# Altium PCB triumvi_v9.1_mcu.PcbDoc
Units mil, origin at the board's own origin, x right, y up, seen from the top; angles counter-clockwise.
Board outline 1100 x 1020 mil, 6 copper layers (Top Layer, GND, VCC, Signal Layer 2, GND (Mid4), Bottom Layer), stack 48.468 mil thick; 61 components, 61 nets, 278 pads, 130 vias.
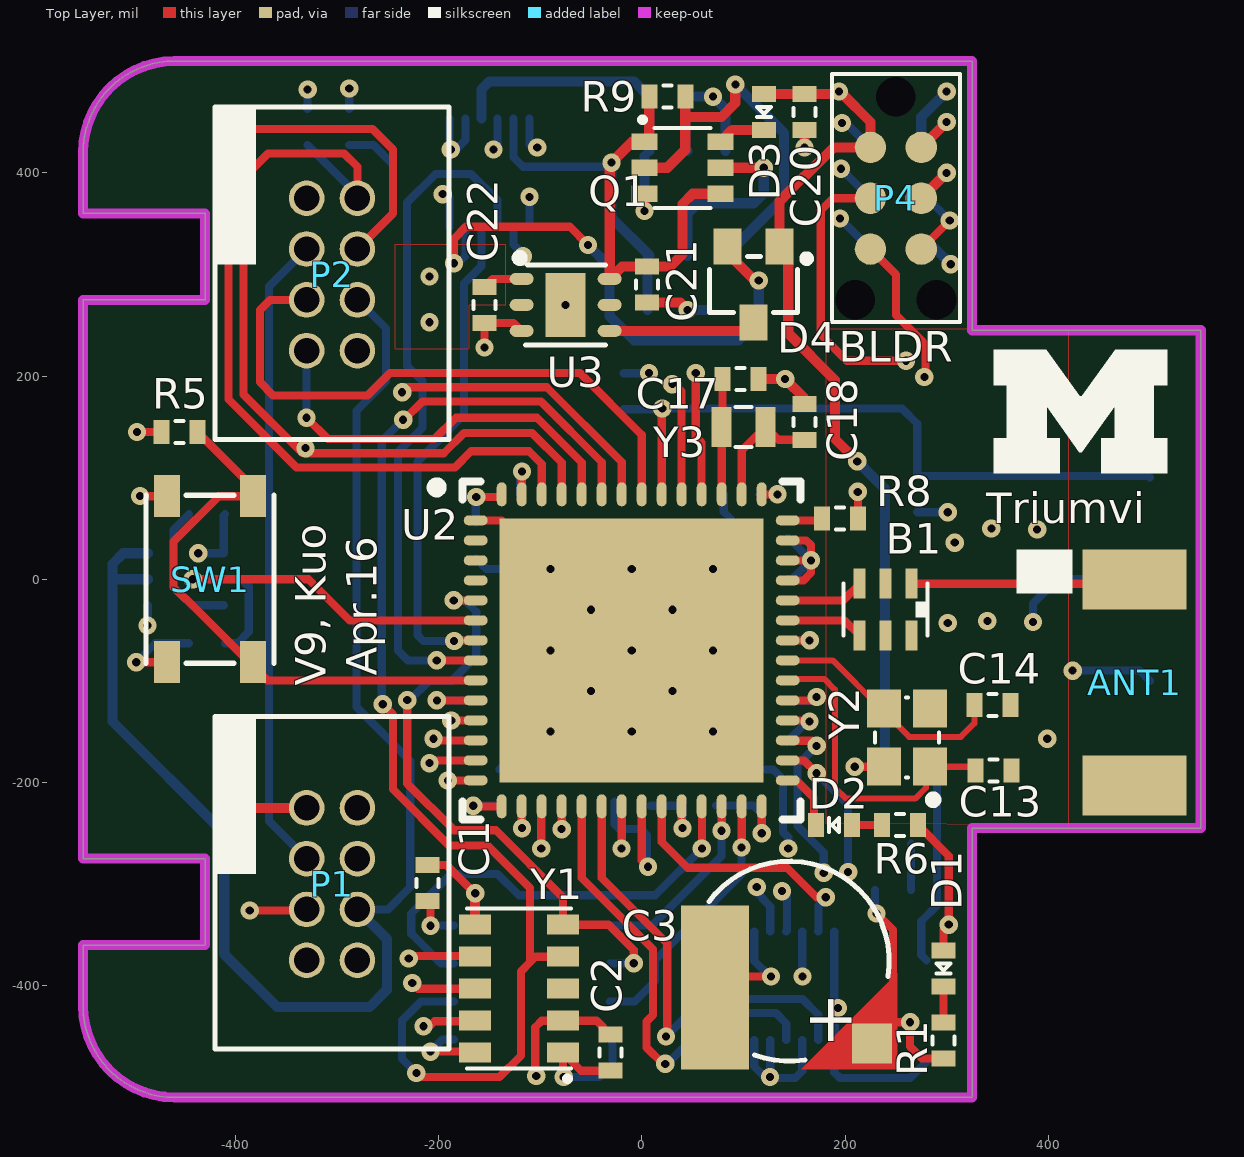
[diagram p0: Top Layer view]
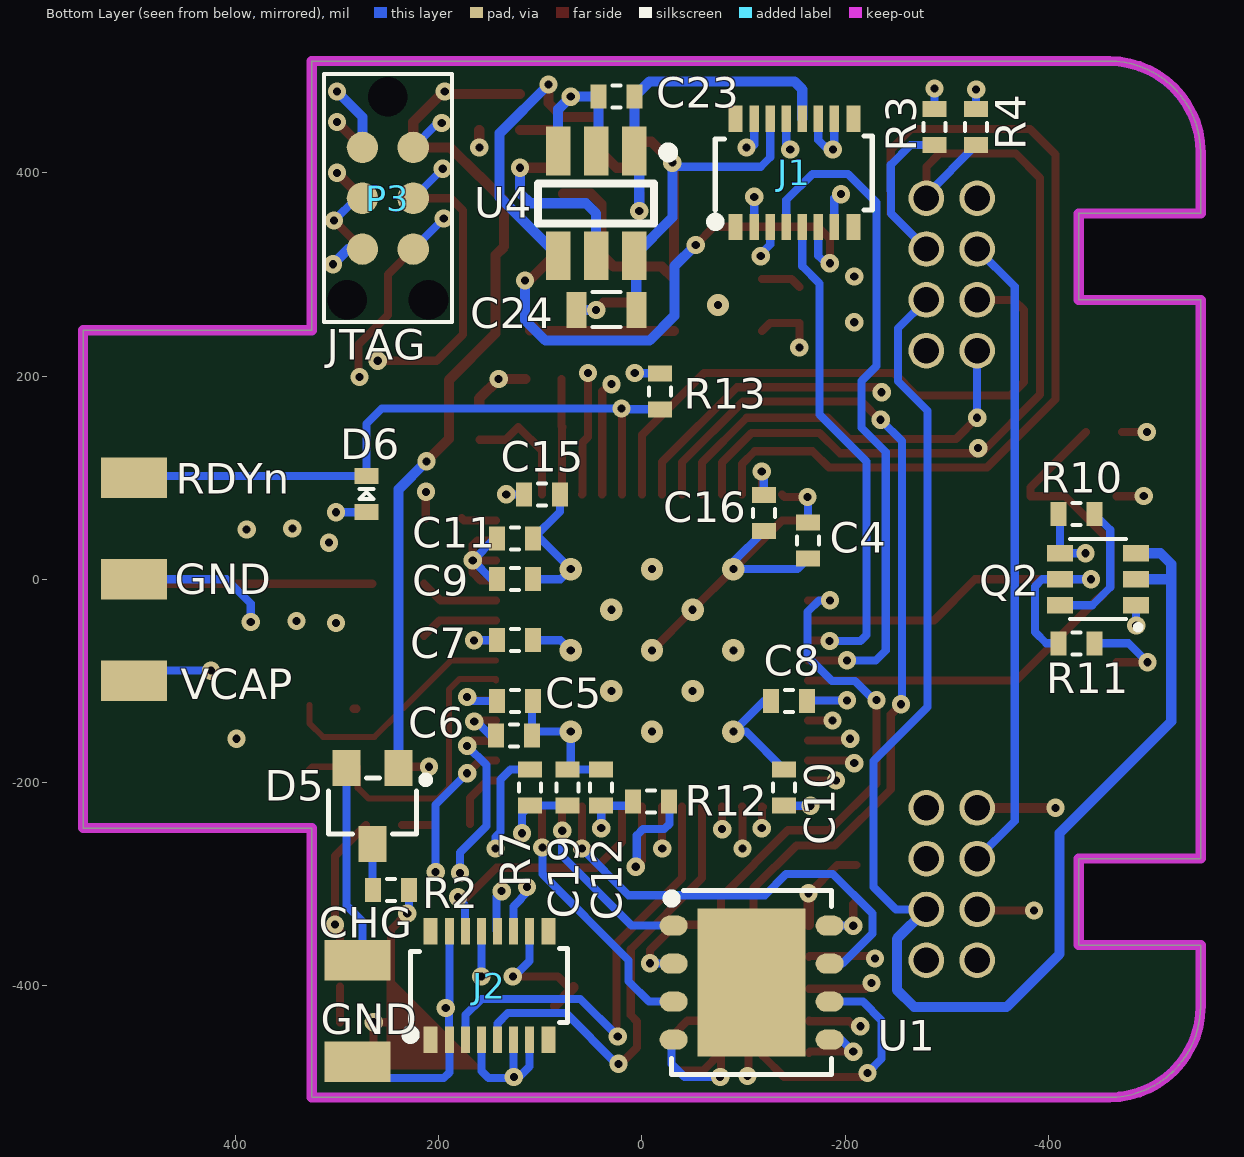
[diagram p1: Bottom Layer view, seen from below]
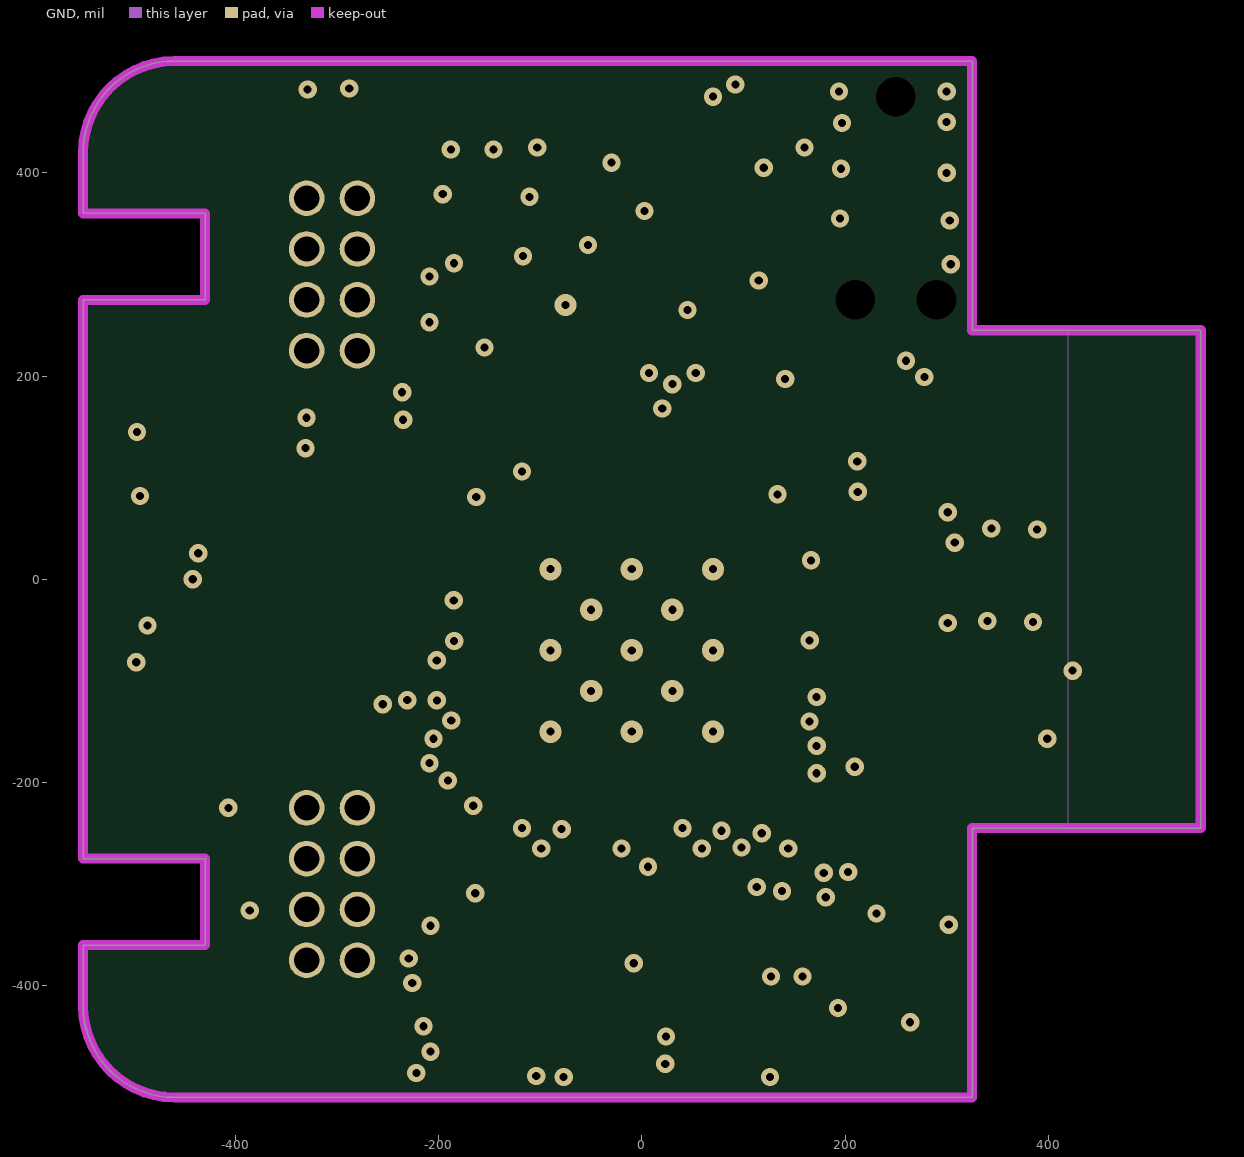
[diagram p2: GND]
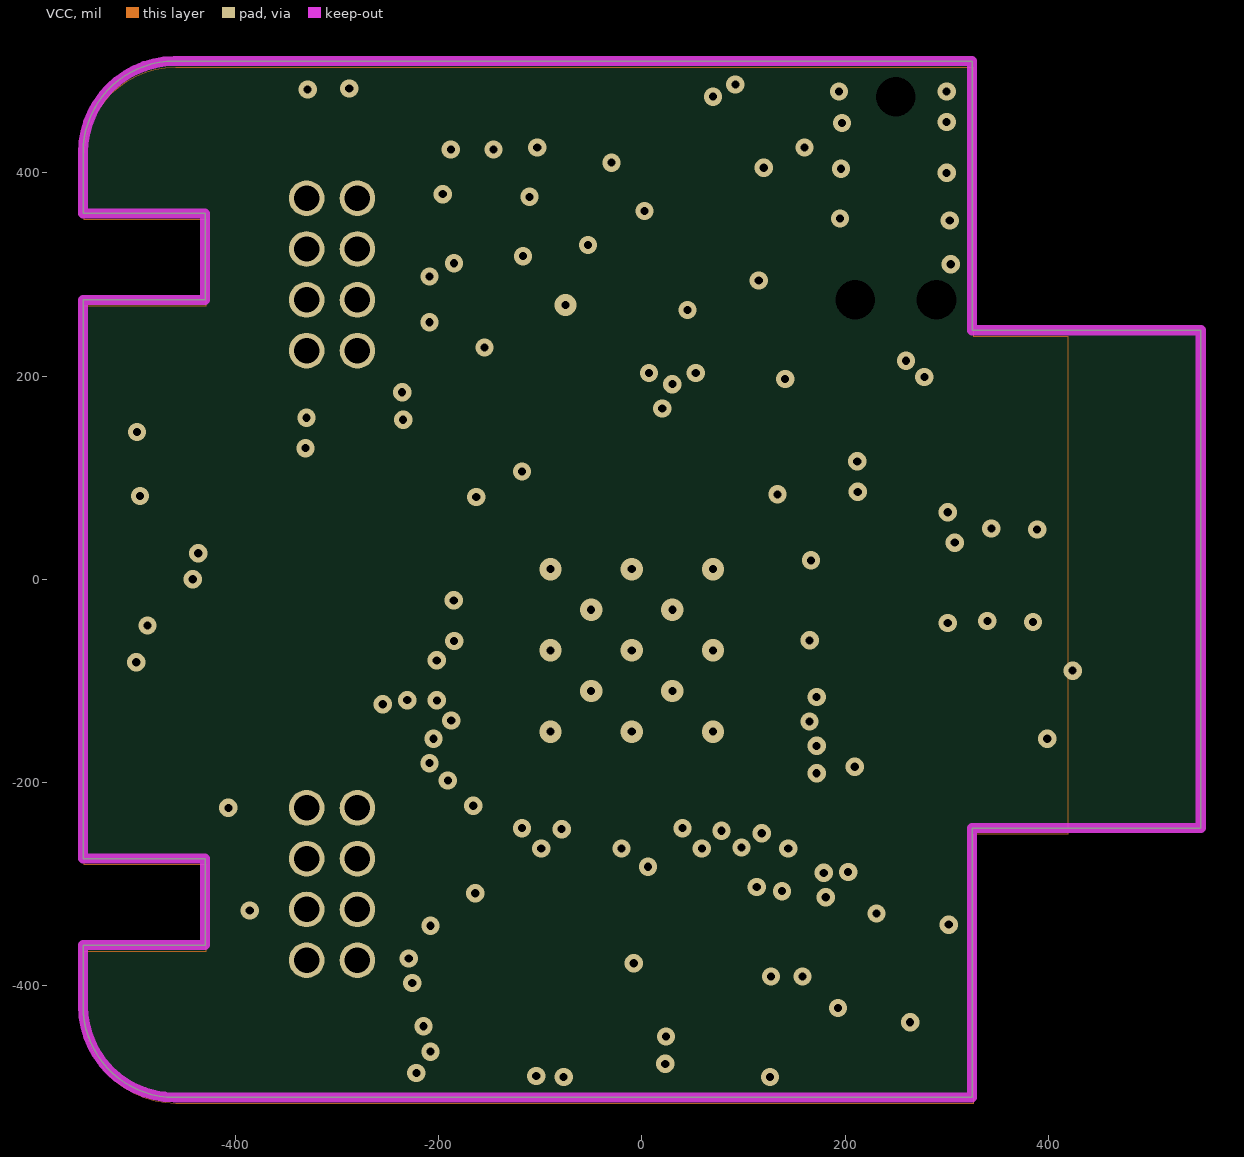
[diagram p3: VCC]
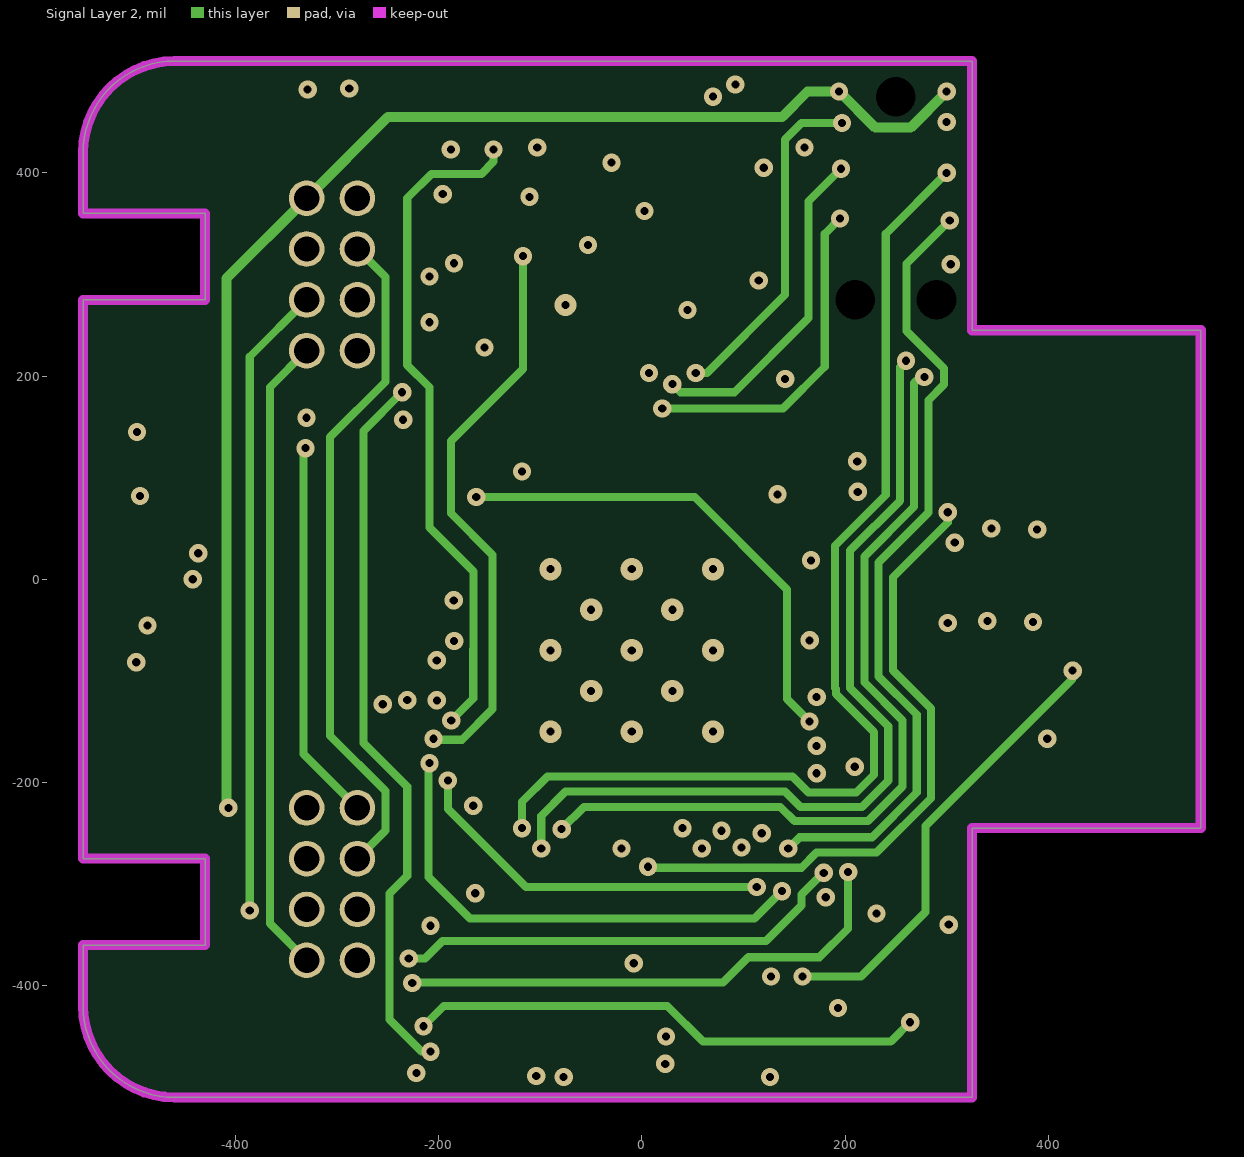
[diagram p4: Signal Layer 2]
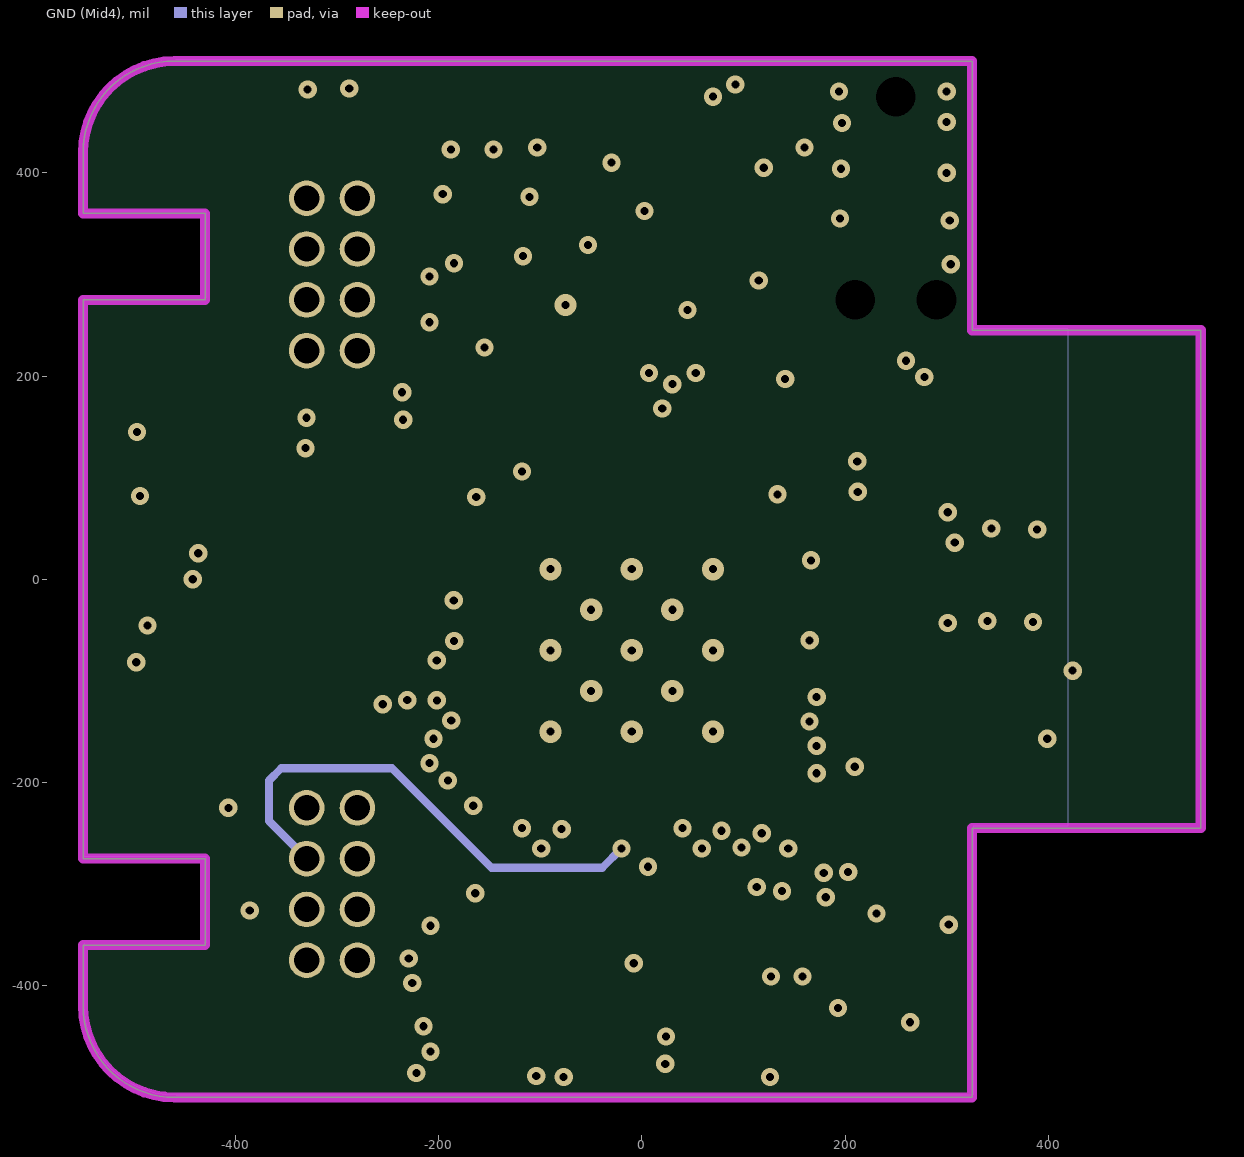
[diagram p5: GND (Mid4)]

## Layer stack, top to bottom
Top Solder: solder mask 0.4, Solder Resist, Dk 3.5
Top Layer: signal copper 1.4
Dielectric 1: core 10, FR-4, Dk 4.2
GND: signal copper 1.417
Dielectric 3: prepreg 5, Dk 4.2
VCC: signal copper 1.417
Dielectric 5: core 10, Dk 4.2
Signal Layer 2: signal copper 1.417
Dielectric 2: core 10, Dk 4.2
GND (Mid4): signal copper 1.417
Dielectric 4: prepreg 5, Dk 4.2
Bottom Layer: signal copper 1.4
Bottom Solder: solder mask 0.4, Solder Resist, Dk 3.5

## Board outline
-460,-510 cw(c-460,-420) -550,-420 -550,-360 -430,-360 -430,-275 -550,-275 -550,275 -430,275 -430,360 -550,360 -550,420 cw(c-460,420) -460,510 325,510 325,245 550,245 550,-245 325,-245 325,-510

## Design rules (kind name [scope] priority, off if disabled: settings)
Clearance "non plated holes" [InPadClass('NPHOLES')] p1: gap=10 // Sunstone Circuits Minimum Clearance Rule (MLB~4&6 Layer Designs)
Clearance "Clearance~Sunstone Circuits" [All] p2: gap=6 // Sunstone Circuits Minimum Clearance Rule (MLB~4&6 Layer Designs)
DiffPairsRouting [All] p1: maxlimit=10 minlimit=10 mostfreqgap=10 toplayer_minwidth=6 toplayer_maxwidth=15 toplayer_prefwidth=15 midlayer1_minwidth=6 midlayer1_maxwidth=15 midlayer1_prefwidth=15 midlayer2_minwidth=6 midlayer2_maxwidth=15 midlayer2_prefwidth=15 midlayer3_minwidth=15 midlayer3_maxwidth=15 midlayer3_prefwidth=15 midlayer4_minwidth=15 midlayer4_maxwidth=15 midlayer4_prefwidth=15 bottomlayer_minwidth=6 bottomlayer_maxwidth=15 bottomlayer_prefwidth=15 maxuncoupledlength=500
Height [All] p1 off: minheight=0 maxheight=1000 prefheight=500
HoleSize "HoleSize~Sunstone Circuits" [All] p1: absolutevalues=TRUE maxlimit=251 minlimit=8 maxpercent=80.000 minpercent=20.000 // Sunstone Circuits Hole Size Rule (MLB~4&6 Layer Designs)
HoleSize Testpoint [All] p2: absolutevalues=TRUE maxlimit=100 minlimit=1 maxpercent=80.000 minpercent=20.000
HoleSize TestPointUsage [All] p3: absolutevalues=TRUE maxlimit=100 minlimit=1 maxpercent=80.000 minpercent=20.000
MinimumAnnularRing "MinimumAnnularRing~Sunstone Circuits" [All] p1 off: minimumring=7 // Sunstone Circuits Minimum Annular Ring (MLB~4&6 Layer Designs)
MinimumSolderMaskSliver [All] p1 off: minsoldermaskwidth=10
PlaneClearance "PlaneClearance~Sunstone Circuits" [All] p1: clearance=12 // Sunstone Circuits Power Plane Clearance Rule (MLB~4&6 Layer Designs)
PlaneConnect "PlaneConnect~Sunstone Circuits" [All] p1: planeconnectstyle=Relief reliefexpansion=10 reliefentries=4 reliefconductorwidth=8 reliefairgap=10 // Sunstone Circuits Power Plane Connect Rule (MLB~4&6 Layer Designs)
PolygonConnect "PolygonConnect~Sunstone Circuits" [All] p1: connectstyle=Relief reliefconductorwidth=8 reliefentries=4 polygonreliefangle="90 Angle" airgapwidth=10 // Sunstone Circuits Polygon Connect Style (MLB~4&6 Layer Designs)
RoomDefinition U_fram_rtc [InComponentClass('U_fram_rtc')] p1: confinementstyle=ConfineIn formatcopy=TRUE lockcomponents=FALSE outline -239.7,-341.48 -239.7,-256.52 195.63,-256.52 195.63,-154.88 320.81,-154.88 320.81,-340.52 325.7,-340.52 325.7,-496.48 -2.3,-496.48 -2.3,-508.48 -59.7,-508.48 -59.7,-506.79 -193.06,-506.79 -193.06,-500.05 -211.55,-500.05 -211.55,-341.48
RoomDefinition U_connectors [InComponentClass('U_connectors')] p2: confinementstyle=ConfineIn formatcopy=TRUE lockcomponents=FALSE outline -512.16,-62.44 -512.16,51.34 -470.48,51.34 -470.48,92.7 -432.5,92.7 -432.5,477.5 -239.27,477.5 -239.27,479.34 175.04,479.34 175.04,509.02 324.96,509.02 324.96,240.98 246.81,240.98 246.81,-479.34 60.73,-479.34 60.73,-474.9 -432.5,-474.9 -432.5,-91.7 -470.48,-91.7 -470.48,-62.44
RoomDefinition U_power_supply [InComponentClass('U_power_supply')] p3 off: confinementstyle=ConfineIn formatcopy=TRUE lockcomponents=FALSE outline -183.7,227.52 -183.7,312.48 -147.99,312.48 -147.99,342.99 -45.71,342.99 -45.71,458.59 -23.16,458.59 -23.16,467.44 -17.48,467.44 -17.48,503.7 67.48,503.7 67.48,502.48 188.7,502.48 188.7,417.52 179.37,417.52 179.37,221.88 -2.01,221.88 -2.01,197.01 -147.99,197.01 -147.99,227.52
RoomDefinition U_mcu [InComponentClass('U_mcu')] p4 off: confinementstyle=ConfineIn formatcopy=TRUE lockcomponents=FALSE outline -500.49,-115.36 -500.49,115.36 -497.48,115.36 -497.48,173.7 -357.7,173.7 -357.7,487.48 -259.3,487.48 -259.3,227.48 10.7,227.48 10.7,225.7 139.48,225.7 139.48,197.48 188.7,197.48 188.7,126.48 299.7,126.48 299.7,49.06 556.1,49.06 556.1,-250.46 296.48,-250.46 296.48,-270.7 211.52,-270.7 146.52,-270.7 146.52,-263.07 -221.77,-263.07 -221.77,-115.36
RoutingVias "RoutingVias~Sunstone Circuits" [All] p1: holewidth=16 width=30 viastyle="Through Hole" minholewidth=6 minwidth=18 maxholewidth=20 maxwidth=40 // Sunstone Circuits Routing Vias Rule (MLB~4&6 Layer Designs)
ShortCircuit "ShortCircuit~Sunstone Circuits" [All] p1: allowed=FALSE // Sunstone Circuits Short Circuit Rule~Do Not Allow (MLB~4&6 Layer Designs)
SilkToSilkClearance [All] p1 off: silktosilkclearance=10
SilkToSolderMaskClearance [IsPad] p1 off: minsilkscreentomaskgap=10 clearancetoexposedcopper=TRUE
SolderMaskExpansion TentVias [isVia] p1: expansion=-20 // Sunstone Circuits Solder Mask Expansion Rule (MLB~4&6 Layer Designs)
SolderMaskExpansion "SolderMaskExpansion~Sunstone Circuits" [All] p2: expansion=3 // Sunstone Circuits Solder Mask Expansion Rule (MLB~4&6 Layer Designs)
ViasUnderSMD "ViasUnderSMD~Sunstone Circuits" [All] p1: allowed=FALSE // Sunstone Circuits Vias Under SMD~Do Not Allow (MLB~4&6 Layer Designs)
Width "Width~Sunstone Circuits" [All] p1: maxlimit=100 minlimit=6 preferedwidth=10 // Sunstone Circuits Minimum Width Rule (MLB~4&6 Layer Designs)
21 further rules are at their usual default settings.

## Classes and differential pairs
component class U_power_supply: C20 C21 C22 C23 C24 D3 D4 Q1 R9 U3 U4
component class U_mcu: ANT1 B1 C4 C5 C6 C7 C8 C9 C10 C11 C12 C13 C14 C15 C16 C17 C18 C19 D2 D6 R3 R4 R5 R6 R7 R8 R12 R13 SW1 U2 Y2 Y3
component class U_fram_rtc: C1 C2 C3 D1 D5 R1 R2 U1 Y1
component class U_connectors: J1 J2 P1 P2 P3 P4 Q2 R10 R11
differential pair CC2538_RF: +CC2538_RF_P -CC2538_RF_N

## Components (designator, comment, footprint, x,y, rotation, side; value= is the part's Value field where it differs from the comment)
ANT1 "Ground Antenna" "Chip Antenna" 490,-82 r270 top
B1 "2450BM15A0002E" 2450BM15A0002 240,-30 r270 top
C1 "Ceramic capacitor" 0402 -211,-299 r90 top
C2 "Ceramic capacitor" 0402 -31,-466 r270 top
C3 "Electric Double Layer Capacitors" XH414HG-IV01E 145,-376 r270 top
C4 "Ceramic capacitor" 0402 -163.54,38.27 r270 bottom
C5 "Ceramic capacitor" 0402 125,-120 r180 bottom
C6 "Ceramic capacitor" 0402 126,-154 r180 bottom
C7 "Ceramic capacitor" 0402 125,-60 r180 bottom
C8 "Ceramic capacitor" 0402 -145,-120 r0 bottom
C9 "Ceramic capacitor" 0402 125,0 r180 bottom
C10 "Ceramic capacitor" 0402 -140,-205 r90 bottom
C11 "Ceramic capacitor" 0402 125,40 r180 bottom
C12 "Ceramic capacitor" 0402 40,-205 r90 bottom
C13 "Ceramic capacitor" 0402 346,-188 r180 top
C14 "Ceramic capacitor" 0402 345,-124 r180 top
C15 "Ceramic capacitor" 0402 98.27,83.54 r180 bottom
C16 "Ceramic capacitor" 0402 -120,65 r270 bottom
C17 "Ceramic capacitor" 0402 97,197 r0 top
C18 "Ceramic capacitor" 0402 160,155 r90 top
C19 "Ceramic capacitor" 0402 73,-205 r90 bottom
C20 "Ceramic capacitor" 0402 160,460 r270 top
C21 "Ceramic capacitor" 0402 5,290 r270 top
C22 "Ceramic capacitor" 0402 -155,270 r270 top
C23 "Ceramic capacitor" 0402 25,475 r0 bottom
C24 "Ceramic capacitor" 0603 35,265 r0 bottom
D1 "D_CDBQR0130L" "0402 - DIODE" 297,-383 r270 top
D2 "LED, Red" "0402 - DIODE" 189,-242 r180 top
D3 "D_CDBQR0130L" "0402 - DIODE" 120,460 r270 top
D4 "D_BAV70W" SOT323 110,290 r180 top
D5 "D_BAV70W" SOT323 265,-223 r0 bottom
D6 "D_CDBQR0130L" "0402 - DIODE" 271,84 r90 bottom
J1 "DF40C-12DP-0.4V" DF40C-12DP-0.4V -150,400 r180 bottom locked
J2 "DF40C-12DP-0.4V" DF40C-12DP-0.4V 150,-400 r180 bottom locked
P1 "TFM-104-01-L-D" TFM-104-01-L-D -305,-300 r270 top
P2 "TFM-104-01-L-D" TFM-104-01-L-D -305,300 r270 top
P3 "TC2030" TC2030-IDC-NLFP 250,375 r270 bottom
P4 "TC2030" TC2030-IDC-NLFP 250,375 r270 top
Q1 "Si1965DH" SC70-6 40,405 r270 top
Q2 "Si1865DDL" SC70-6 -449,0 r90 bottom
R1 "Chip resistor" 0402 297,-454 r270 top
R2 "Chip resistor" 0402 247,-306 r180 bottom
R3 "Chip resistor" 0402 -288,445 r270 bottom
R4 "Chip resistor" 0402 -329,445 r270 bottom
R5 "Chip resistor" 0402 -455,145 r0 top
R6 "Chip resistor" 0402 254,-242 r0 top
R7 "Chip resistor" 0402 110,-205 r90 bottom
R8 "Chip resistor" 0402 195,60 r0 top
R9 "Chip resistor" 0402 25,475 r0 top
R10 "Chip resistor" 0402 -428,64 r180 bottom
R11 "Chip resistor" 0402 -428,-63 r180 bottom
R12 "Chip resistor" 0402 -9,-219 r180 bottom
R13 "Chip resistor" 0402 -18,185 r90 bottom
SW1 "PTS810" PTS810 -425,0 r90 top
U1 "FM25V02-DG" TDFN-8 -108,-397 r180 bottom
U2 "CC2538" QFN56 -10,-70 r0 top
U3 "ADP151_LFCSP" CP-6-3 -75,270 r0 top
U4 "LTC4412" TSOT-23 45,370 r270 bottom
Y1 "RV-3049-C3" RV-3049-C3 -121,-403 r90 top
Y2 "FA-128" FA-128 261,-156 r90 top
Y3 "ABS05" ABS05 100,150 r180 top

## Footprints (in the part's own frame and the unit in brackets; to place one, negate y for a bottom-side part, rotate by r counter-clockwise, add the part's x,y. Pads: shape width x height; smd on the part's side, far side on the other; paste and mask are expansions set on the pad)
0402 [mm] "2-Leads, Body 1.00x0.50mm, IPC Medium Density"
  rect 0.4x0.6 smd: 1(-0.45,0) 2(0.45,0)
  silkscreen extent -0.1,-0.28 0.1,0.28, body extent -0.53,-0.28 0.53,0.27, height 0.4
"0402 - DIODE" [mm] "2-Leads, Body 1.00x0.50mm, IPC Medium Density"
  rect 0.4x0.6 smd: 1(-0.45,0) 2(0.45,0)
  silkscreen extent -0.13,-0.18 0.13,0.18, body extent -0.53,-0.28 0.53,0.27, height 0.4
0603 [mm] "2-Leads, Body 1.55x0.85mm, IPC Medium Density"
  rect 0.5x0.9 smd: 1(-0.75,0) 2(0.75,0)
  silkscreen extent -0.35,-0.45 0.35,0.43, body extent -0.75,-0.42 0.75,0.43, height 0.5
2450BM15A0002 [mm] "Chip Array, Flat, 6-Leads, Pitch 0.65mm,  Body 2.00x1.25mm,  IPC Medium Density"
  rect 0.75x0.3 smd: 1(-0.65,0.65) 2(-0.65,0) 3(-0.65,-0.65) 4(0.65,-0.65) 5(0.65,0) 6(0.65,0.65)
  silkscreen extent -0.65,-1.05 0.65,1.05, body extent -0.67,-1.05 0.67,1.05, height 0.81
ABS05 [mm] "ABS05 Crystal"
  rect 0.5x1 smd: 1(-0.55,0) 2(0.55,0)
  silkscreen extent -0.2,-0.5 0.2,0.5, body extent -0.8,-0.5 0.8,0.5, height 0.5
"Chip Antenna" [mm] "FR05-S1-N-0-102"
  rect 1.5x2.6 smd: 1(-2.075,-0.125) ""(3.075,-0.125)
  silkscreen extent -2.83,-3.08 -1.73,-1.68, body extent -3.03,-1.63 3.98,1.38, height 2.2
CP-6-3 [mm] "QFN, 6-Leads, Body 2.00x2.00mm, Pitch 0.65mm, Thermal Pad 1.00x1.55mm, IPC Medium Density"
  oval 0.6x0.3 smd: 1(-1.1,0.65) 2(-1.1,0) 3(-1.1,-0.65) 4(1.1,-0.65) 5(1.1,0) 6(1.1,0.65)
  rect 1x1.6 smd: 7(0,0)
  silkscreen extent -1.25,-1 1,1.27, body extent -1,-1 1,1, height 0.6
DF40C-12DP-0.4V [mm] "Hirose DF40 Series, 0.4mm pitch, 12 positions"
  rect 0.23x0.66 smd: 1(-1,-1.355) 2(-0.6,-1.355) 3(-0.2,-1.355) 4(0.2,-1.355) 5(0.6,-1.355) 6(1,-1.355) 7(1,1.355) 8(0.6,1.355) 9(0.2,1.355) 10(-0.2,1.355) 11(-0.6,1.355) 12(-1,1.355)
  rect 0.35x0.66 smd: ""(-1.475,-1.355) ""(-1.475,1.355) ""(1.475,-1.355) ""(1.475,1.355)
  silkscreen extent -2.08,-1.33 1.95,0.92, body extent -1.97,-1.49 1.95,1.48, height 1.09
FA-128 [mm] "Seiko Epson FA-128 Crystal"
  rect 0.95x0.85 smd: 1(-0.725,-0.575) 2(0.725,-0.575) 3(0.725,0.575) 4(-0.725,0.575)
  silkscreen extent -1.63,-0.8 1,0.8, body extent -1,-0.8 1,0.8, height 0.5
PTS810 [mm] "C & K PTS 810 Microminiature SMT"
  rect 1.05x0.65 smd: 1(-2.075,1.075) 2(2.075,1.075) 3(-2.075,-1.075) 4(2.075,-1.075)
  silkscreen extent -2.1,-1.6 2.1,1.6, body extent -2.1,-1.6 2.1,1.6, height 4.1
QFN56 [mm] "QFN, 56-Leads, Body 8.00x8.00mm, Pitch 0.50mm, Thermal Pad 6.60x6.60mm, IPC Medium Density"
  oval 0.6x0.25 smd: 1(-3.9,3.25) 2(-3.9,2.75) 3(-3.9,2.25) 4(-3.9,1.75) 5(-3.9,1.25) 6(-3.9,0.75) 7(-3.9,0.25) 8(-3.9,-0.25) 9(-3.9,-0.75) 10(-3.9,-1.25) 11(-3.9,-1.75) 12(-3.9,-2.25) 13(-3.9,-2.75) 14(-3.9,-3.25) 29(3.9,-3.25) 30(3.9,-2.75) 31(3.9,-2.25) 32(3.9,-1.75) 33(3.9,-1.25) 34(3.9,-0.75) 35(3.9,-0.25) 36(3.9,0.25) 37(3.9,0.75) 38(3.9,1.25) 39(3.9,1.75) 40(3.9,2.25) 41(3.9,2.75) 42(3.9,3.25)
  oval 0.25x0.6 smd: 15(-3.25,-3.9) 16(-2.75,-3.9) 17(-2.25,-3.9) 18(-1.75,-3.9) 19(-1.25,-3.9) 20(-0.75,-3.9) 21(-0.25,-3.9) 22(0.25,-3.9) 23(0.75,-3.9) 24(1.25,-3.9) 25(1.75,-3.9) 26(2.25,-3.9) 27(2.75,-3.9) 28(3.25,-3.9) 43(3.25,3.9) 44(2.75,3.9) 45(2.25,3.9) 46(1.75,3.9) 47(1.25,3.9) 48(0.75,3.9) 49(0.25,3.9) 50(-0.25,3.9) 51(-0.75,3.9) 52(-1.25,3.9) 53(-1.75,3.9) 54(-2.25,3.9) 55(-2.75,3.9) 56(-3.25,3.9)
  rect 6.6x6.6 smd: 57(0,0)
  silkscreen extent -5,-4.22 4.22,4.23, body extent -4.08,-4.07 4.07,4.08, height 1
RV-3049-C3 [mm] "RV-3049-C3"
  rect 0.5x0.8 smd: 1(-1.6,-1.1) 2(-0.8,-1.1) 3(0,-1.1) 4(0.8,-1.1) 5(1.6,-1.1) 6(1.6,1.1) 7(0.8,1.1) 8(0,1.1) 9(-0.8,1.1) 10(-1.6,1.1)
  silkscreen extent -2.26,-1.3 2,1.3, body extent -1.9,-1.3 1.9,1.3, height 0.9
SC70-6 [mm]
  rect 0.406x0.648 smd: 1(-0.65,-0.95) 2(0,-0.95) 3(0.65,-0.95) 4(0.65,0.95) 5(0,0.95) 6(-0.65,0.95)
  silkscreen extent -1.2,-1 1,0.7, body extent -1,-0.7 1,0.7, height 1.1
SOT323 [mm] "SOT323"
  rect 0.7x0.9 smd: 1(-0.65,-0.95) 2(0.65,-0.95) 3(0,0.95)
  silkscreen extent -1.38,-0.71 1.1,0.7, body extent -1.1,-0.7 1.1,0.7, height 1
TC2030-IDC-NLFP [mil]
  round 31 smd paste-1181.1: 1(-50,-25) 2(-50,25) 3(0,-25) 4(0,25) 5(50,-25) 6(50,25)
  round 0 hole 39 unplated: ""(-100,0) ""(100,-40) ""(100,40)
  Top Layer pour cut-out: -50,25 -50,-25 50,-25 50,25
  silkscreen extent -122,-63 122,63
TDFN-8 [mm] "CYPRESS TDFN-8 (4 x 4.5 x 0.8 mm)"
  oval 0.7x0.5 smd: 1(-1.95,1.425) 2(-1.95,0.475) 3(-1.95,-0.475) 4(-1.95,-1.425) 5(1.95,-1.425) 6(1.95,-0.475) 7(1.95,0.475) 8(1.95,1.425)
  rect 2.7x3.7 smd: 9(0,0)
  silkscreen extent -2.1,-2.3 2,2.3, body extent -2,-2.3 2,2.3, height 0.8
TFM-104-01-L-D [mm] "Samtec 50 mil through hole connector"
  round 0.89 hole 0.635: 1(-1.905,-0.635) 2(-0.635,-0.635) 3(0.635,-0.635) 4(1.905,-0.635) 5(1.905,0.635) 6(0.635,0.635) 7(-0.635,0.635) 8(-1.905,0.635)
  silkscreen extent -4.19,-2.92 4.13,2.92, body extent -4.13,-2.86 4.13,2.85, height 5.59
TSOT-23 [mm] "SOT23, 6-Leads, Body 2.90x2.45mm, Pitch 0.95mm, IPC Medium Density"
  rect 1.22x0.62 smd: 1(-1.31,0.95) 2(-1.31,0) 3(-1.31,-0.95) 4(1.31,-0.95) 5(1.31,0) 6(1.31,0.95)
  silkscreen extent -1.4,-1.45 0.5,1.92, body extent -0.88,-1.45 0.87,1.45, height 1
XH414HG-IV01E [mm] "Seiko instruments XH414HG-IV01E"
  rect 1x1 smd: 1(2.05,2.075)
  rect 4.1x1.7 smd: 2(0.65,-1.85)
  Top Layer region: 2.7,0.3 2.7,2.7 0.3,2.7
  silkscreen extent -2.5,-2.01 2.5,2.5, body extent -2.4,-2.4 2.4,2.4, height 1.85

## Part data
ANT1: "2.4GHz Surface Mount Device (SMD) On Ground Antenna, 50 Ohms"
B1: "2.45 GHz Balun for TI CC253X"
C1 C2 C4 C5 C6 C7 C8 C9 C10 C12 C15 C16: library part C_0.1u_16V_0402_ceramic, "Ceramic capacitor, 0.1u, 16 V, 0402 package"
C3: library part C_80m_3.3V_supercap, "Electric double Layer Capacitors"
C11: library part C_220p_50V_0402_ceramic, "Ceramic capacitor, 220 pF, 0402 package"
C13 C14: library part C_12p_0402_ceramic, "Ceramic capacitor, 12 pF, 0402 package"
C17 C18: library part C_22p_0402_ceramic, "Ceramic capacitor, 22 pF, 0402 package"
C19: library part C_1000p_50V_0402_ceramic, "Ceramic capacitor, 1000 pF, 0402 package"
C20 C23: library part C_4.7u_6.3V_0402_ceramic, "Ceramic capacitor, 4.7 uF, 6.3V, 0402 package"
C21 C22: library part C_1u_16V_0402_ceramic, "Ceramic capacitor, 1 uF, 16V, 0402 package"
C24: library part C_10u_6.3V_0603_ceramic, "Ceramic capacitor, 10 uF, 0603 package"
D1 D3 D6: "SMD Schottky Barrier Diode"
D2: library part D_LED_RED_0402, "LED, Red, 0402"
D4 D5: "DUAL SURFACE MOUNT SWITCHING DIODE"
J1 J2: "Hirose BM20 Series, 0.4mm pitch, 12 pos, header"
P1 P2: "Samtec 50 mil, 8 pos, double row"
P3 P4: "TC2030-MCP-NL"
Q1: "Dual P-Channel 12 V (D-S) MOSFET"
Q2: "Load Switch with Level-Shift"
R1: library part R_100K_0402, "Chip resistor, 100K, 0402 package"
R2 R3 R4 R5: library part R_10K_0402, "Chip resistor, 10K, 0402 package"
R6 R7: library part R_2.2K_0402, "Chip resistor, 2.2K, 0402 package"
R8: library part R_56K_0402, "Chip resistor, 56K, 0402 package"
R9: library part R_470K_0402, "Chip resistor, 470K, 0402 package"
R10 R11 R12 R13: library part R_1M_0402, "Chip resistor, 1M, 0402 package"
SW1: "Tactile Switches"
U1: "256-Kbit (32 K ⊙ 8) Serial (SPI) F-RAM"
U2: "A Powerful System-On-Chip for 2.4-GHz IEEE 802.15.4, 6LoWPAN  and ZigBee Applications"
U3: "Ultralow Noise, 200 mA,  CMOS Linear Regulator"
U4: "Low Loss PowerPath Controller in ThinSOT"
Y1: "Real Time Clock Module with SPI-Bus"
Y2: "MHz Range Crystal Unit"
Y3: "32768 Hz SMD Low profile crystal"

## Free pads (board coordinates)
  rect 65x40 smd far side: ""(280,-475) ""(280,-375) ""(500,-100) ""(500,0) ""(500,100)

## Via types
v1: diameter 18, hole 8, Top Layer to Bottom Layer, 116 vias
v2: diameter 22, hole 8, Top Layer to Bottom Layer, 13 vias
v3: diameter 21.65, hole 8, Top Layer to Bottom Layer, 1 vias

## Nets (pads, with @x,y where several pads share a name; then routed paths per layer and width w, separated by ;. In a path a pad name is that pad's centre, name@x,y a point inside that pad or via, vN(x,y) a via of type N, cw(c..) or ccw(c..) an arc to the next point about the centre after c; other vN are vias at no path point)
BATT_PACK_DETECT: P1.4 P2.4 U2.52 | length 1033.7
  Top Layer w8: v1(-330,159) -309,138 -204,138 -183,159 -103.2,159 -59.21,115.01 U2.52
  Signal Layer 2 w8: P1.4 -366,-339 -366,189 P2.4
  Bottom Layer w8: v1(-330,159) P2.4
BATT_PACK_PWR: P1.6 P2.6 Q2.2 Q2.3 | length 1467.4
  Bottom Layer w8: P1.6 -250,-325 -228,-303 -228,-178.87 -281,-125.87 -281,165.87 -252,194.87 -252,247 P2.6
  Bottom Layer w10: Q2.2 -521,0 ; Q2.3 -510.41,25.59 -521,15 -521,0 ; P1.6 -251,-354 -251,-404 -268,-421 -359,-421 -411,-369 -411,-250 -521,-140 -521,0
BLD_CTRL: P4.5 U2.18 | length 981.2
  Top Layer w8: v1(-79,-246) -78.9,-245.9 U2.18 ; P4.5 250,300 250,260 279,231 279,200 v1(278,199)
  Signal Layer 2 w8: v1(-79,-246) -57,-224 136.2,-224 150.2,-238 222.55,-238 256.54,-204.01 256.54,-138.95 219,-101.4 219,22.4 268,71.4 268,193 274,199 v1(278,199)
BLD_RX: P4.4 U2.16 | length 1108.7
  Top Layer w8: U2.16@-119,-224.28 U2.16 -118.27,-244.73 v1(-118,-245)
  Top Layer w10: P4.4 v1(300,400)
  Signal Layer 2 w8: v1(-118,-245) -118,-219 -93,-194 148.13,-194 164.13,-210 210.96,-210 228.54,-192.41 228.54,-150.54 191,-113 191,-108.13 190,-107.13 190,33 240,83 240,340 v1(300,400)
BLD_TX: P4.3 U2.17 | length 1165.3
  Top Layer w8: v1(-99,-265) -99,-223.96 U2.17 ; P4.3 188,375 176,363 176,241 202,215 v1(260,215)
  Signal Layer 2 w8: v1(-99,-265) -99,-233 -75,-209 141,-209 156,-224 216.76,-224 242.54,-198.21 242.54,-144.74 205,-107.2 205,28.2 254,77.2 254,209 v1(260,215) v1@261,215
CC2538_RF_N: B1.3 U2.38 | length 77.7
  Top Layer w8: U2.38 198.03,-20.79 B1.3
CC2538_RF_P: B1.4 U2.37 | length 77.1
  Top Layer w8: U2.37 199.29,-40.47 B1.4
EXT_VOLT_SEL: P1.3 P2.3 U2.49 | length 1275.9
  Top Layer w8: v1(-386,-326) P1.3@-331,-326 ; P2.3 -366,275 -376,265 -376,194 -363,181 -270,181 -248,203 -61,203 -0.16,142.16 U2.49
  Signal Layer 2 w8: v1(-386,-326) -386,219 P2.3
  Bottom Layer w8: P1.3@-331,-326 P1.3
EXT_VOLT_WAVE: P1.2 P2.2 U2.21 | length 1164.9
  Top Layer w8: v1(-20,-265) -19.84,-264.84 U2.21
  GND (Mid4) w8: P1.2 -367,-238 -367,-198 -355,-186 -245.87,-186 -147.87,-284 -39,-284 v1(-20,-265)
  Bottom Layer w8: P1.2 -367,-238 -367,288 P2.2
G1: Q1.5 U4.5 | length 192.5
  Top Layer w10: Q1.5 v1(120,405)
  Bottom Layer w10: U4.5 45,360 55,370 110,370 120,380 v1(120,405)
G2: Q1.2 R9.2 U4.4 | length 388.6
  Top Layer w10: Q1.2 25,405 42.72,422.72 42.72,455 ; R9.2 42.72,455 ; v1(91.97,486.97) 91.97,468.69 78.28,455 42.72,455
  Bottom Layer w10: U4.4@80,316.02 U4.4 140,376.02 140,438.94 v1(91.97,486.97)
GND: B1.2 B1.5 B1.6 C1.2 C2.2 C3.2 C4.2 C5.2 C6.2 C7.2 C8.2 C9.2 C10.2 C11.2 C12.2 C13.1 C14.1 C15.2 C16.2 C17.2 C18.2 C19.2 C20.2 C21.2 C22.2 C23.2 C24.2 J1.1 J1.6 J1.7 J1.8 J1.12 J2.1 J2.3 J2.5 J2.6 J2.7 J2.12 P1.5 P2.5 P3.5 P4.2 pad.@280,-475 pad.@500,0 Q2.1 R8.2 R11.2 R13.2 SW1.1 SW1.2 U1.4 U2.1 U2.57 U3.3 U3.7 U4.2 U4.3 Y1.1 Y1.6 Y2.2 Y2.4 | length 2507.6
  Top Layer w8: v1(-497.69,-81.69) SW1.1 ; v1@-493.69,81.69 SW1.2 ; C1.2 -192.33,-281.28 v1@-164.31,-309.31 ; U2.1 -137.95,57.95 v2(-90,10) v2(-50,-30) v2(-10,-70) ; v1(-155,228) C22.2 -126.18,252.28 U3.3 ; v1(-77,-490) -77.69,-489.31 Y1.1 -59.97,-483.72 C2.2 ; C3.2 82.76,-391 v1(127,-391) ; v1(209.54,-184.54) Y2.4 ; v1(212.43,86) 212.72,85.72 R8.2 ; Y2.2@281,-127.46 Y2.2
  Top Layer w10: Y1.6 v1@-164.31,-309.31 ; C21.2 37.72,272.28 v1(45,265) ; C3.2@67.17,-401.59 C3.2@85.57,-420 ; C17.2 v1(141,197) 160,178 C18.2 ; v1(160,425) C20.2 ; P4.2 v1(300,450)
  Bottom Layer w8: v1(-497.69,-81.69) -479,-63 R11.2 ; v1(-486.6,-45.6) -486.4,-45.6 Q2.1 ; v1(-196,379) -193,379 -189.37,375.37 J1.6 ; J1.7 -189.37,424.37 v1(-188,423) -183,423 -173.62,432.38 J1.8 ; C4.2 -152.99,10 v2(-90,10) -90,17.28 C16.2 ; C10.2 -102.72,-150 v2(-90,-150) -120,-120 C8.2 ; J1.1 v1(-110.63,376.37) ; J1.12 -110.63,427.63 -104,421 -104,424 v1(-103,425) ; v1(-77,-490) -42,-490 -29,-477 -29,-455.33 U1.4 ; R13.2 7.28,202.72 v1(7,203) ; C12.2 C19.2 70,-184.28 v2(70,-150) 104.28,-150 C6.2 108.28,-121 C5.2 ; v2(70,-70) 80,-60 C7.2 ; C15.2 80.55,66.45 C11.2@107,40 ; C9.2 80,0 v2(70,10) 100,40 C11.2@107,40 ; C11.2 C11.2@107,40 ; J2.6 110.63,-479.63 121,-490 v1(126,-490) ; J2.7@111,-347.02 J2.7 110.63,-375.63 126,-391 v1(127,-391) ; J2.5 126.38,-489.62 v1(126,-490) ; J2.3 157.87,-484.13 151,-491 127,-491 v1(126,-490) ; J2.12 189.37,-418.37 v1(193,-422) 190,-425 190,-452.72 J2.1 189.37,-485.37 195,-491 264,-491 pad.@280,-475 ; v1(385,-42) 385,-24 409,0 pad.@500,0
  Bottom Layer w10: v1(45,265) C24.2 ; U4.2 42.72,423.86 C23.2 v1(70,475) 82.4,462.6 U4.3 ; P3.5 289,325 v1(304,310)
  other v1: -164,-309 399,-157 301,-43 340,-41 308,36 389,49 344,50 -494,82
  other v2: -10,-150 -50,-110 30,-110 -90,-70 30,-30 -10,10
  other v3: -75,270
I2C_SCL: P1.8 P2.8 R4.2 U2.53 | length 1206.5
  Top Layer w8: v1@-335,125 -392,182 -392,395 -368,419 -293,419 -280,406 P2.8 ; v1@-331,124 -195,124 -175,144 -108,144 -78.9,114.9 U2.53
  Signal Layer 2 w8: v1@-334,126 v1@-333,127 ; v1(-331,129) v1@-333,127 ; P1.8 -333,-172 v1@-333,127
  Bottom Layer w8: R4.2 -280,378.28 P2.8
I2C_SDA: P1.7 P2.7 R3.2 U2.54 | length 1728.4
  Top Layer w8: P2.7 -245,360 -245,423 -265,443 -382,443 -407,418 -407,177.2 -339.8,110 -184,110 -168,126 -111.13,126 -98.58,113.45 U2.54
  Signal Layer 2 w8: P1.7 -252.48,-247.48 -252.48,-208.52 -307,-154 -307,139.87 -252.48,194.39 -252.48,297.48 P2.7
  Bottom Layer w8: R3.2 -264.28,427.28 -245,408 -245,382.53 -245.04,382.49 -245.04,359.96 P2.7
LDO_EN: D4.3 U3.4 | length 152.7
  Top Layer w10: U3.4 101.81,244.41 D4.3 D4.3@110,245
NetANT1_1: ANT1.1 B1.1 | length 221.2
  Top Layer w8.46: B1.1 480.98,-4.41 ANT1.1
NetC3_1: C3.1 R1.2 R2.2 Y1.9 | length 781.7
  Top Layer w8: v1@-208,-439 -204,-435 -164.31,-435 Y1.9 ; 225,-436 v1(264,-436) 264,-460 275.72,-471.72 R1.2 ; v1(231,-329) 247,-345 247,-424
  Signal Layer 2 w8: v1(-215,-440) -195,-420 25,-420 60,-455 245,-455 v1(264,-436)
  Bottom Layer w8: R2.2 229.28,-327.28 v1(231,-329)
NetC4_1: C4.1 C6.1 U2.32 U2.56 | length 586.6
  Top Layer w8: v1(-163,81) -140.5,81 U2.56 ; U2.32 163.9,-138.9 v1(165,-140)
  Signal Layer 2 w8: v1(-163,81) 52,81 143,-10 143,-118 v1(165,-140)
  Bottom Layer w8: C4.1 -163.54,80.46 v1(-163,81) ; C6.1@142.72,-160 162.72,-140 v1(165,-140)
NetC13_2: C13.2 U2.34 Y2.1 | length 314.3
  Top Layer w6: U2.34 143.54,-98 179.46,-98 190,-108.54 190,-205 201,-216 269,-216 279.64,-205.36 Y2.1@279.64,-184.54 ; Y2.1 324.83,-184.54 C13.2
NetC14_2: C14.2 U2.35 Y2.3 | length 235.5
  Top Layer w6: U2.35 187.75,-79.84 Y2.3@234.36,-126.46 ; Y2.3 238.36,-130.34 263.18,-155.16 313.84,-155.16 327.28,-141.72 C14.2
NetC17_1: C17.1 U2.45 Y3.2 | length 113.9
  Top Layer w8: U2.45 78.58,149.76 Y3.2 79.28,150.94 C17.1
NetC18_1: C18.1 U2.44 Y3.1 | length 119.8
  Top Layer w8: U2.44 98.27,126.61 Y3.1 134.37,137.28 C18.1
NetC19_1: C19.1 R7.1 U2.28 | length 94.1
  Top Layer w8: U2.28 v1(118,-250) v1(118,-250)
  Bottom Layer w8: C19.1 R7.1 118,-230.72 v1(118,-250)
NetD1_2: D1.2 R1.1 | length 35.6
  Top Layer w8: R1.1 D1.2
NetD2_1: D2.1 R6.1 | length 29.6
  Top Layer w8: D2.1 R6.1
NetD3_2: D3.2 Q1.6 | length 47.4
  Top Layer w10: Q1.6 89.09,442.28 D3.2
NetD5_3: D5.3 R2.1 | length 45.7
  Bottom Layer w8: R2.1 265,-305.72 D5.3
NetJ1_2: J1.2 U2.12 | length 638.6
  Top Layer w8: v1(-205,-157) -203.42,-158.58 U2.12
  Signal Layer 2 w8: v1(-205,-157) -204,-158 -177.13,-158 -147,-127.87 -147,24 -188,65 -188,136 -117,207 v1(-117,318) v1@-117,318.75
  Bottom Layer w8: J1.2 -126.38,329.38 -117,320 v1(-117,318)
NetJ1_3: J1.3 U2.8 | length 675.3
  Top Layer w8: v1(-201.84,-79.84) U2.8
  Bottom Layer w8: v1(-201.84,-79.84) -230.16,-79.84 -240,-70 -240,125.13 -216,149.13 -216,195 -231.04,210.04 -231.04,370.83 -202.87,399 -168,399 -142.13,373.13 J1.3
NetJ1_4: J1.4 U2.7 | length 488.1
  Top Layer w8: v1(-184.77,-60.84) v1@-184.09,-60.16 ; v1@-184,-60.07 v1@-184.09,-60.16 ; U2.7 v1@-184.09,-60.16
  Bottom Layer w8: v1(-184.77,-60.84) -215.16,-60.84 -221,-55 -221,116 -175,162 -175,291 -157.87,308.13 J1.4
NetJ1_10: J1.10 U2.11 | length 718.1
  Top Layer w8: v1(-187.63,-139) -163.65,-139 U2.11
  Signal Layer 2 w8: v1(-187.63,-139) -166,-117.37 -166,-68.94 -165.77,-68.71 -165.77,7.77 -209,51 -209,189 -231,211 -231,375 -207,399 -158,399 -146,411 v1(-146,423)
  Bottom Layer w8: v1(-146,423) -142.13,426.87 J1.10
NetJ2_2: J2.2 U2.20 | length 450.2
  Top Layer w8: U2.20 -39.53,-293.87 25,-358.4 25,-448.7 v1(23.7,-450)
  Bottom Layer w8: v1(23.7,-450) 60.7,-413 158,-413 173.62,-428.62 J2.2
NetJ2_4: J2.4 U2.19 | length 454.2
  Top Layer w8: U2.19 -59.21,-293.99 11,-364.2 11,-429 4.7,-435.3 4.7,-460.7 21,-477 v1(23,-477)
  Bottom Layer w8: v1(23,-477) 24.81,-477 74.81,-427 132,-427 142.13,-437.13 J2.4
NetJ2_8: J2.8 U2.14 | length 440.6
  Top Layer w8: v1(-191,-198) v1(-191,-198) U2.14
  Signal Layer 2 w8: v1(-191,-198) -191,-226 -114,-303 v1(113,-303)
  Bottom Layer w8: v1(113,-303) 113,-308 119,-314 119,-314.87 126.38,-322.25 J2.8
NetJ2_9: J2.9 U2.13 | length 577.3
  Top Layer w8: v1(-209,-181) -206.27,-178.27 U2.13
  Signal Layer 2 w8: v1(-209,-181) -210,-182 -210,-293 -169,-334 111,-334 v1(138,-307)
  Bottom Layer w8: v1(138,-307) 143,-312 143,-345.78 J2.9
NetJ2_11: J2.11 U2.23 | length 255.7
  Top Layer w8: U2.23 19.53,-258.53 45,-284 143,-284 172,-313 v1(181,-313)
  Bottom Layer w8: J2.11 174,-346.28 174,-321 181,-314 v1(181,-313)
NetQ2_5: Q2.5 R11.1 U2.6 | length 426
  Top Layer w8: v1(-442,0) -328,0 -287.53,-40.47 U2.6
  Bottom Layer w8: v1(-442,0) Q2.5 -394,0 -387,-7 -387,-52 -398,-63 R11.1
NetQ2_6: Q2.6 R10.2 | length 134.9
  Bottom Layer w8: R10.2 -461,48.72 -461,-7.87 -443.28,-25.59 Q2.6
NetR5_2: R5.2 SW1.3 SW1.4 U2.9 | length 563.1
  Top Layer w8: R5.2 -382.68,90.39 SW1.4 -416.31,81.69 -461,37 -461,-7.87 -449.87,-19 -449,-19 -368.47,-99.53 U2.9
NetR8_1: R8.1 U2.42 | length 34.6
  Top Layer w8: U2.42 175.24,57.95 R8.1
NetU1_1: U1.1 U2.26 | length 188.7
  Top Layer w8: v1(78.42,-247.58) 78.58,-247.58 U2.26
  Bottom Layer w8: U1.1@-30.13,-342 U1.1 10.1,-340.9 78.42,-272.58 v1(78.42,-247.58)
NetU1_3: U1.3 U2.27 | length 260
  Top Layer w8: v1(98,-264) 98.27,-263.73 U2.27
  Bottom Layer w8: U1.3 -7,-415.7 13,-395.7 13,-375 98,-290 v1(98,-264)
NetU1_7: U1.7 U2.25 | length 445.6
  Top Layer w8: U2.25 59,-223.65 v1(59,-265)
  Bottom Layer w8: U1.7 -197.57,-378.3 -227,-348.87 -227,-329.13 -187.87,-290 -142,-290 -121,-311 13,-311 v1(59,-265)
NetU2_30: U2.30 Y1.8 | length 715.4
  Top Layer w8: v1(-226.04,-397.3) -220.34,-403 Y1.8 ; U2.30 159.4,-178.27 171.13,-190 172,-190 v1(172,-191)
  Signal Layer 2 w8: v1(-226.04,-397.3) -225.74,-397 80,-397 105,-372 175,-372 203,-344 v1(203,-288.13)
  Bottom Layer w8: v1(172,-191) 203,-222 v1(203,-288.13)
NetU2_31: U2.31 Y1.7 | length 690.6
  Top Layer w8: v1(-229.44,-373.3) -227.14,-371 -164.81,-371 Y1.7 ; U2.31 143.54,-159 167,-159 v1(172,-164)
  Signal Layer 2 w8: v1(-229.44,-373.3) -213.43,-373.3 -196.13,-356 122,-356 157,-321 157,-310.13 178.13,-289 v1(179,-289)
  Bottom Layer w8: v1(172,-164) 153,-183 153,-243 179,-269 v1(179,-289)
PD3: D2.2 U2.29 | length 58.7
  Top Layer w8: U2.29 152.08,-197.95 169.28,-215.15 D2.2@169.28,-241
PGOOD: D4.2 J1.5 | length 542.3
  Top Layer w8: v1(-185,311) -185,335 -173,347 -71,347 v1(-53,329)
  Top Layer w10: D4.2 84.41,320.59 111,294 v1(115,294)
  Bottom Layer w8: v1(-185,311) -181,311 -173.62,318.38 J1.5
  Bottom Layer w10: v1(-53,329) -32,308 -32,259.36 -7.64,235 95,235 115,255 v1(115,294)
R\E\A\D\Y\: D6.1 R12.2 U2.22 | length 809
  Top Layer w8: U2.22 -0.16,-276.84 v1(6,-283)
  Signal Layer 2 w8: v1(6,-283) 7,-284 157,-284 171.87,-269.13 231.02,-269.13 284.54,-215.61 284.54,-127.35 247,-89.8 247,2 301,56 v1(301,66)
  Bottom Layer w8: R12.2 -27,-219.28 -27,-241 -22,-246 -1,-246 5,-252 5,-282 v1(6,-283) ; D6.1 271.28,66 v1(301,66)
R\E\S\E\T\: P3.3 P4.6 R7.2 | length 969.9
  Top Layer w8: P4.6 v1(303,353)
  Signal Layer 2 w8: v1(144,-265) 155,-254 226.35,-254 270.54,-209.81 270.54,-133.15 233,-95.6 233,16.6 282,65.6 282,176.13 297.5,191.63 297.5,207.5 260.5,244.5 260.5,310.5 v1(303,353)
  Bottom Layer w8: R7.2@110,-190 R7.2 129.28,-187.28 139,-197 139,-248.8 144,-253.8 v1(144,-265) ; P3.3 281,375 v1(303,353)
SPI_CLK: U1.6 U2.51 Y1.4 | length 1245.7
  Top Layer w8: v1(-255,-123) -245,-133 -245,-206.67 -189.67,-262 -152,-262 -110,-304 -110,-377 ; v1(-235,157) -235,156 -216,175 -99.4,175 -39.53,115.13 U2.51 ; v1(-222,-486) -218,-490 -140,-490 -119,-469 -119,-386 -110,-377 ; Y1.4 -104.5,-371.5 -110,-377
  Bottom Layer w8: v1@-256,-123 -256,136 v1(-235,157) ; v1(-222,-486) -236,-472 -236,-434.13 -217.57,-415.7 U1.6
SPI_MISO: U1.2 U2.5 Y1.5 | length 603.3
  Top Layer w8: v1(-231,-119) -231,-200.87 -184.87,-247 -143.87,-247 -77.69,-313.18 Y1.5 -32.99,-340.01 -8,-365 v1(-8,-378) ; v1(-185.21,-20.79) U2.5
  Bottom Layer w8: v1(-231,-119) -228.44,-119 -209.66,-100.21 -187.21,-100.21 -163,-76 -163,-32 -174.21,-20.79 v1(-185.21,-20.79) ; U1.2 -8.3,-378.3 v1(-8,-378)
SPI_MOSI: U1.5 U2.50 Y1.10 | length 1058.4
  Top Layer w8: v1@-232,189 -93.6,189 -19.84,115.24 U2.50 ; v1(-208,-465) -165.3,-465 Y1.10
  Signal Layer 2 w8: v1(-236,184) -274,146 -274,-161 -231,-204 -231,-292 -248.44,-309.44 -248.44,-433.43 -216.87,-465 v1(-208,-465)
  Bottom Layer w8: v1(-208,-465) -196.1,-453.1 U1.5
TCK: P3.4 U2.47 | length 482.3
  Top Layer w8: v1(30,192) 32,192 39,185 39,83.76 U2.47
  Signal Layer 2 w8: v1(30,192) 38,184 91,184 164,257 164,372 v1(196,404)
  Bottom Layer w8: v1(196,404) P3.4
TDO: D6.2 P3.6 pad.@500,100 R13.1 U2.48 | length 1032.7
  Top Layer w8: U2.48 19.53,167.53 v1(20,168)
  Signal Layer 2 w8: v1(20,168) 138.87,168 180,209.13 180,340 v1(195,355)
  Bottom Layer w8: R13.1 19.28,167.28 v1(20,168) 256,168 271,153 D6.2 498.28,101.72 pad.@500,100 ; v1(195,355) P3.6
TMS: P3.2 U2.46 | length 495.3
  Top Layer w8: v1(53,203) 53,140 58.5,134.5 58.5,83.94 U2.46
  Signal Layer 2 w8: v1(53,203) 64,203 141,280 141,432.87 157.13,449 v1(197,449)
  Bottom Layer w8: v1(197,449) 201,449 P3.2
V_CHARGE: D5.2 pad.@280,-375 | length 187.9
  Bottom Layer w8: pad.@280,-375 275,-370 275,-336.59 290.59,-321 D5.2@290.59,-195.6
V_EXTERNAL: C20.1 D3.1 D4.1 D5.1 P1.1 P2.1 P3.1 P4.1 | length 2329.3
  Top Layer w10: v1(-407,-225) P1.1 ; D3.1 C20.1 v1@194,477.72 ; v1@197.28,477.72 225,450 P4.1 188.72,425 160.72,397 160,397 135.59,372.59 D4.1 144,318.99 144,242 190,196 190,138 v1(212,116)
  Signal Layer 2 w10: v1(-407,-225) -409,-223 -409,296 P2.1 -250,455 138,455 163,480 v1(194,480) 194.28,480 229.78,444.5 264.5,444.5 v1(300,480)
  Bottom Layer w10: v1(212,116) 239.41,88.59 D5.1 ; P3.1 275,455 v1(300,480)
V_HARVEST: C23.1 J1.9 Q1.3 U4.1 | length 331.5
  Top Layer w10: Q1.3 v1(2.6,362.4) v1@5,360
  Bottom Layer w10: J1.9 -157.87,482.13 -150,490 -7.72,490 C23.1 7.28,421.89 U4.1 ; v1(2.6,362.4) U4.1@2.6,416.57
V_SELECTED: C21.1 C24.1 J1.11 Q1.1 Q1.4 R9.1 U3.6 U4.6 | length 676
  Top Layer w10: v1@-31.69,410 U3.6 -19.57,307.72 C21.1 27.72,307.72 40,320 40,369.41 50,379.41 Q1.4 ; v1(-30,410) -9.41,430.59 Q1.1 7.28,435.28 R9.1
  Bottom Layer w8: J1.11 -126.38,415.38 -117,406 -34,406 v1(-30,410)
  Bottom Layer w10: v1(-30,410) -30,356.02 U4.6 5.47,316.3 C24.1
VCAP_DIVIDE: J2.10 pad.@500,-100 | length 569.5
  Signal Layer 2 w8: v1(158,-391) 215.67,-391 279,-327.67 279,-243 424,-98 v1(424,-90)
  Bottom Layer w8: J2.10 157.87,-390.87 v1(158,-391) ; v1(424,-90) 490,-90 pad.@500,-100
VCC_MCU: C1.1 C2.1 C5.1 C7.1 C8.1 C9.1 C10.1 C11.1 C12.1 C15.1 C16.1 C22.1 D1.1 Q2.4 R3.1 R4.1 R5.1 R6.2 R10.1 R12.1 U1.8 U2.10 U2.15 U2.24 U2.33 U2.36 U2.39 U2.40 U2.41 U2.43 U2.55 U3.1 Y1.2 | length 1048.8
  Top Layer w8: v1(-497,145) R5.1 ; C1.1 -208,-319.72 v1(-208,-341) ; v1(-201.79,-119.21) U2.10 ; v1(-166,-223) -165.46,-223.54 U2.15 ; C22.1 -147.13,295.59 U3.1 ; U2.55 -118.27,105.73 v1(-118,106) ; v1(-104,-489) -105,-489 -105,-441 -98.5,-434.5 Y1.2 -44.79,-434.5 C2.1 ; U2.24 39.21,-244.21 v1(40,-245) ; U2.43 v1(133.54,83.54) ; U2.33 170.79,-119.21 172,-118 v1(172,-116) ; U2.36 v1(165.16,-60.16) ; U2.39 158.9,-1.1 166.42,6.42 v1(166.42,18.58) ; U2.40 v1(166.42,18.58) ; U2.41 161.73,38.27 166.42,33.58 v1(166.42,18.58) ; R6.2 302,-272.28 v1(302,-340) 297,-345 D1.1
  Bottom Layer w8: v1@-437,26 v1(-436.59,25.59) Q2.4 -411.6,62.69 R10.1 ; v1@-332,485 v1(-329,482) R4.1 ; R3.1 v1(-288,483) ; v1(-208,-341) -207.9,-340.9 U1.8 ; v1(-201.79,-119.21) -163.5,-119.21 C8.1 ; v1(-166,-223) -140.28,-223 C10.1 ; C16.1 -120,104 v1(-118,106) ; R12.1@8.72,-223 39.72,-223 C12.1 v1(40,-245) ; C15.1 v1(133.54,83.54) ; C5.1 168,-120 v1(172,-116) ; C7.1 165,-60 v1(165.16,-60.16) ; C9.1 147.83,0 v1(166.42,18.58) 145,40 C11.1
  other v1: -209,253 -209,298
pads on no net: ANT1. J1. J2. P3. P4. U1.9 U2.2 U2.3 U2.4 U3.2 U3.5 Y1.3

## Polygon pours and split planes (outlines as drawn)
VCC_MCU on Top Layer "Top Layer-No Net" (solid, shelved, pour order 2): -243,329 -243,227 -170,227 -170,268 -170,270 -135,270 -134,270 -134,329
GND on Top Layer "Top Layer-No Net" (solid, shelved, pour order 0): 420,-241 420,246 304,246 181,246 181,-240
GND on GND "Top Layer-No Net" (solid, shelved, pour order 6): -549,-418 -549,-358 -429,-358 -429,-273 -549,-273 -549,277 -429,277 -429,362 -549,362 -549,422 cw(c-459,422) -459,512 326,512 326,247 419,247 419,-243 326,-243 326,-508 -459,-508 cw(c-459,-418)
GND on GND (Mid4) "Top Layer-No Net" (solid, shelved, pour order 4): -549,-418 -549,-358 -429,-358 -429,-273 -549,-273 -549,277 -429,277 -429,362 -549,362 -549,422 cw(c-459,422) -459,512 326,512 326,247 419,247 419,-243 326,-243 326,-508 -459,-508 cw(c-459,-418)
VCC_MCU on VCC "Top Layer-No Net" (solid, shelved, pour order 8): -549,-426 -549,-366 -429,-366 -429,-281 -549,-281 -549,269 -429,269 -429,354 -549,354 -549,414 cw(c-459,414) -459,504 326,504 326,239 419,239 419,-251 326,-251 326,-516 -459,-516 cw(c-459,-426)

## Keep-outs
Keep-Out Layer:
  the board outline again, w10

## Silkscreen, mask and mechanical layers (free items; w line width, h text height)
Top Overlay:
  region: 346.55,104.17 411.51,104.17 411.51,138.85 398.3,138.85 398.3,170.23 430.51,125.09 432.71,125.09 465.46,170.23 465.46,138.85 452.25,138.85 452.25,104.17 517.21,104.17 517.21,138.85 504,138.85 504,191.15 517.21,191.15 517.21,225.83 465.74,225.83 432.71,180.14 431.06,180.14 398.03,225.83 346.55,225.83 346.55,191.15 359.22,191.15 359.22,138.85 346.55,138.85
  text "BLDR" at 194,214 h30
  text "Triumvi" at 339,55 h30
  text "Apr.16" at -261,-95 h30 r90
  text "V9, Kuo" at -311,-105 h30 r90
Bottom Overlay:
  text "JTAG" at 310,216 h30
  text "RDYn" at 459,84 h30
  text "GND" at 460,-15 h30
  text "VCAP" at 454,-118 h30
  text "CHG" at 318,-353 h30
  text "GND" at 316,-448 h30
Mechanical 14:
  lines w10: -561,-285 -440,-285 -440,-350 -560,-350 -560,-420 ccw(c-460,-420) -460,-520 ; -561,285 -440,285 -440,350 -560,350 -560,420 cw(c-460,420) -460,520 ; 335,-545 335,-255 585,-255 ; 335,545 335,255 585,255
Mechanical 16:
  lines w10: -650,-520 650,-520 ; -650,520 650,520 ; -560,-610 -560,610 ; 560,-610 560,610

## Text inside footprints (layer, text, board x,y; h text height)
C3: Top Overlay "+" at 165.67,-406.51 h48 r270